# Altium PCB smartmcu.v2.PcbDoc
Units mil, origin at the board's own origin, x right, y up, seen from the top; angles counter-clockwise.
Board outline 2102 x 1843 mil, 4 copper layers (Top Layer, GND Layer, 3.3V Layer, Bottom Layer), stack 23.756 mil thick; 88 components, 43 nets, 255 pads, 83 vias.
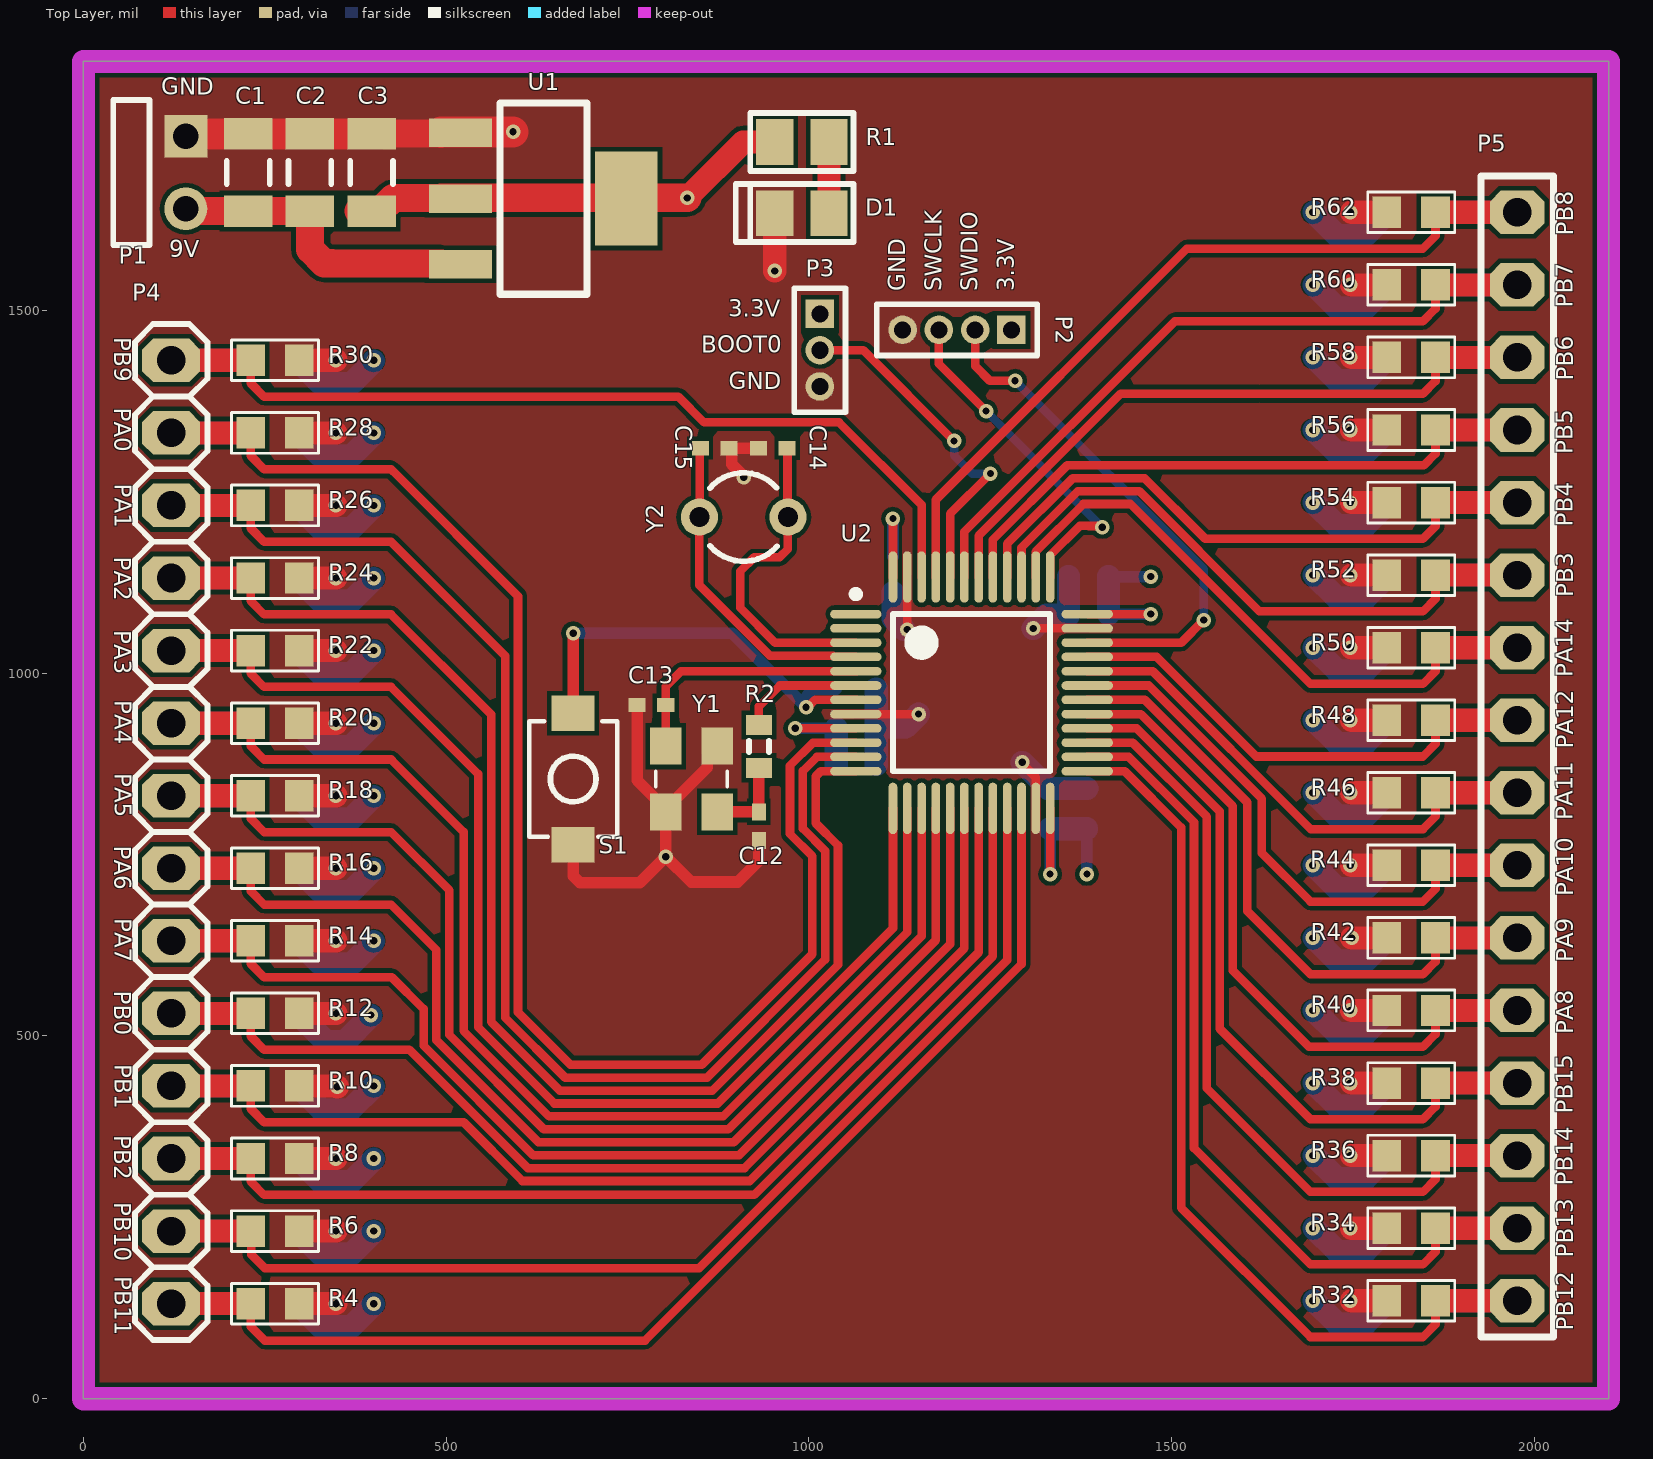
[diagram p0: Top Layer view]
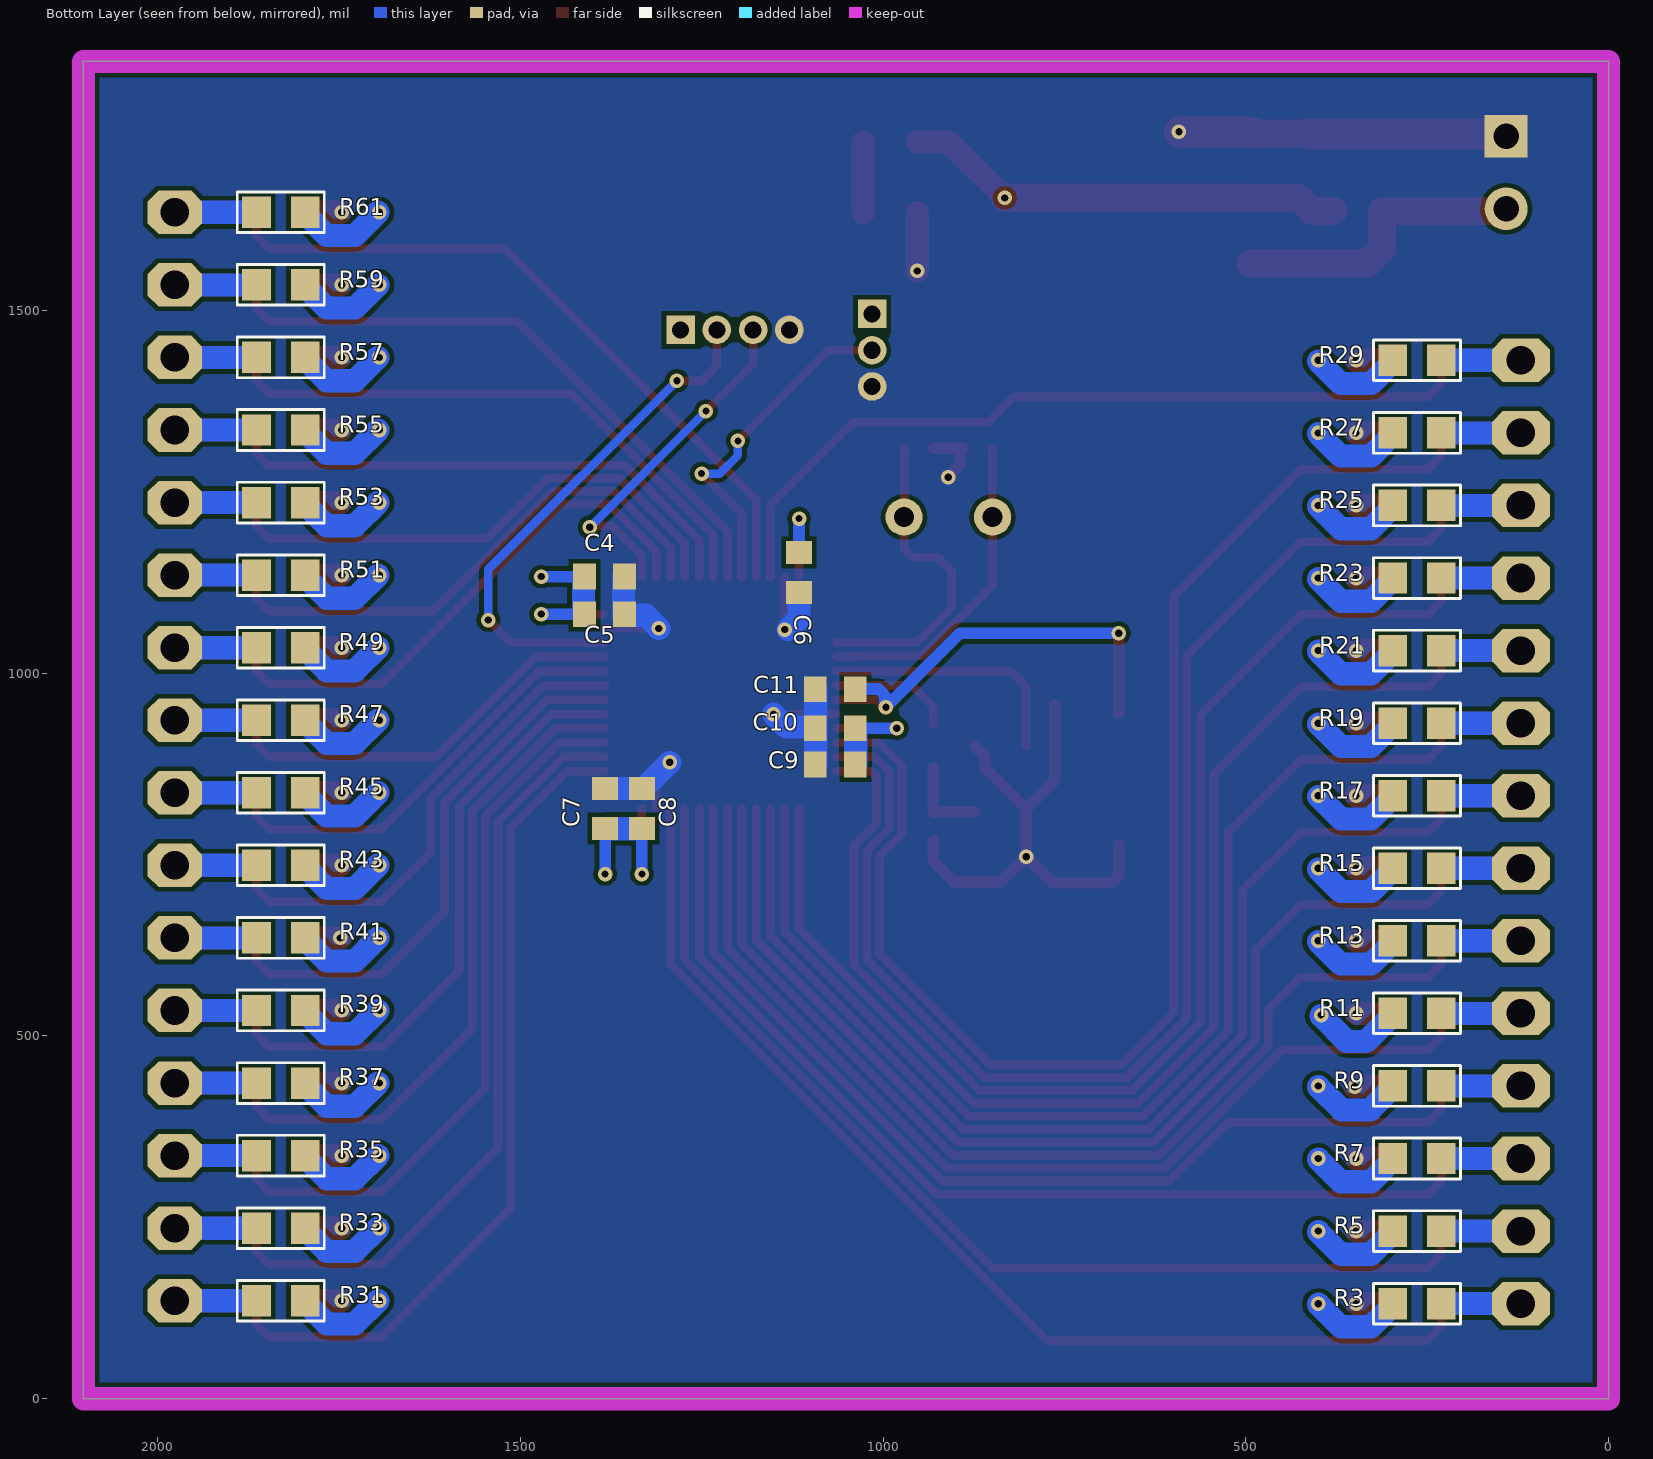
[diagram p1: Bottom Layer view, seen from below]
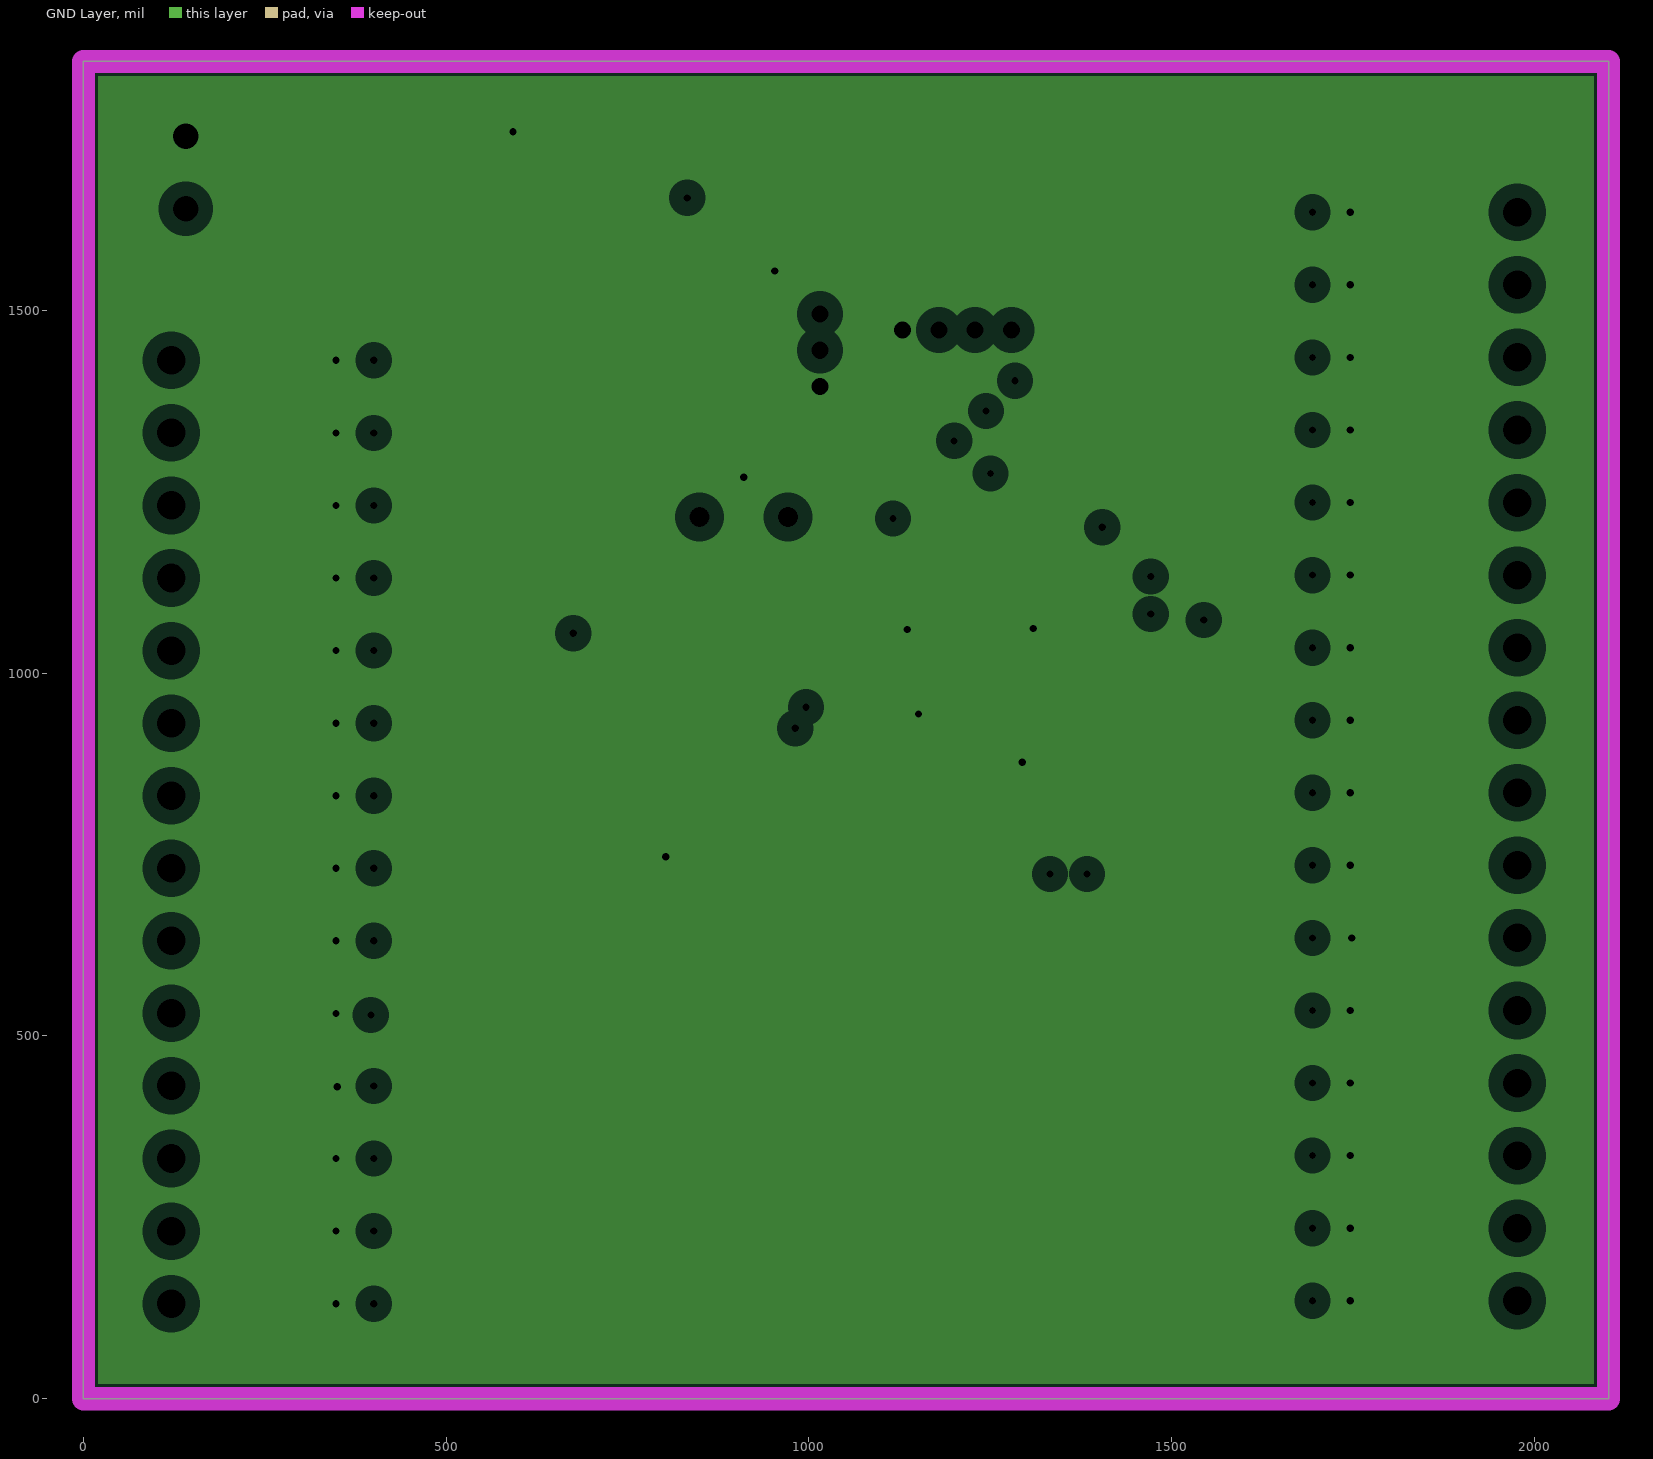
[diagram p2: GND Layer, clearances drawn from the general rule]
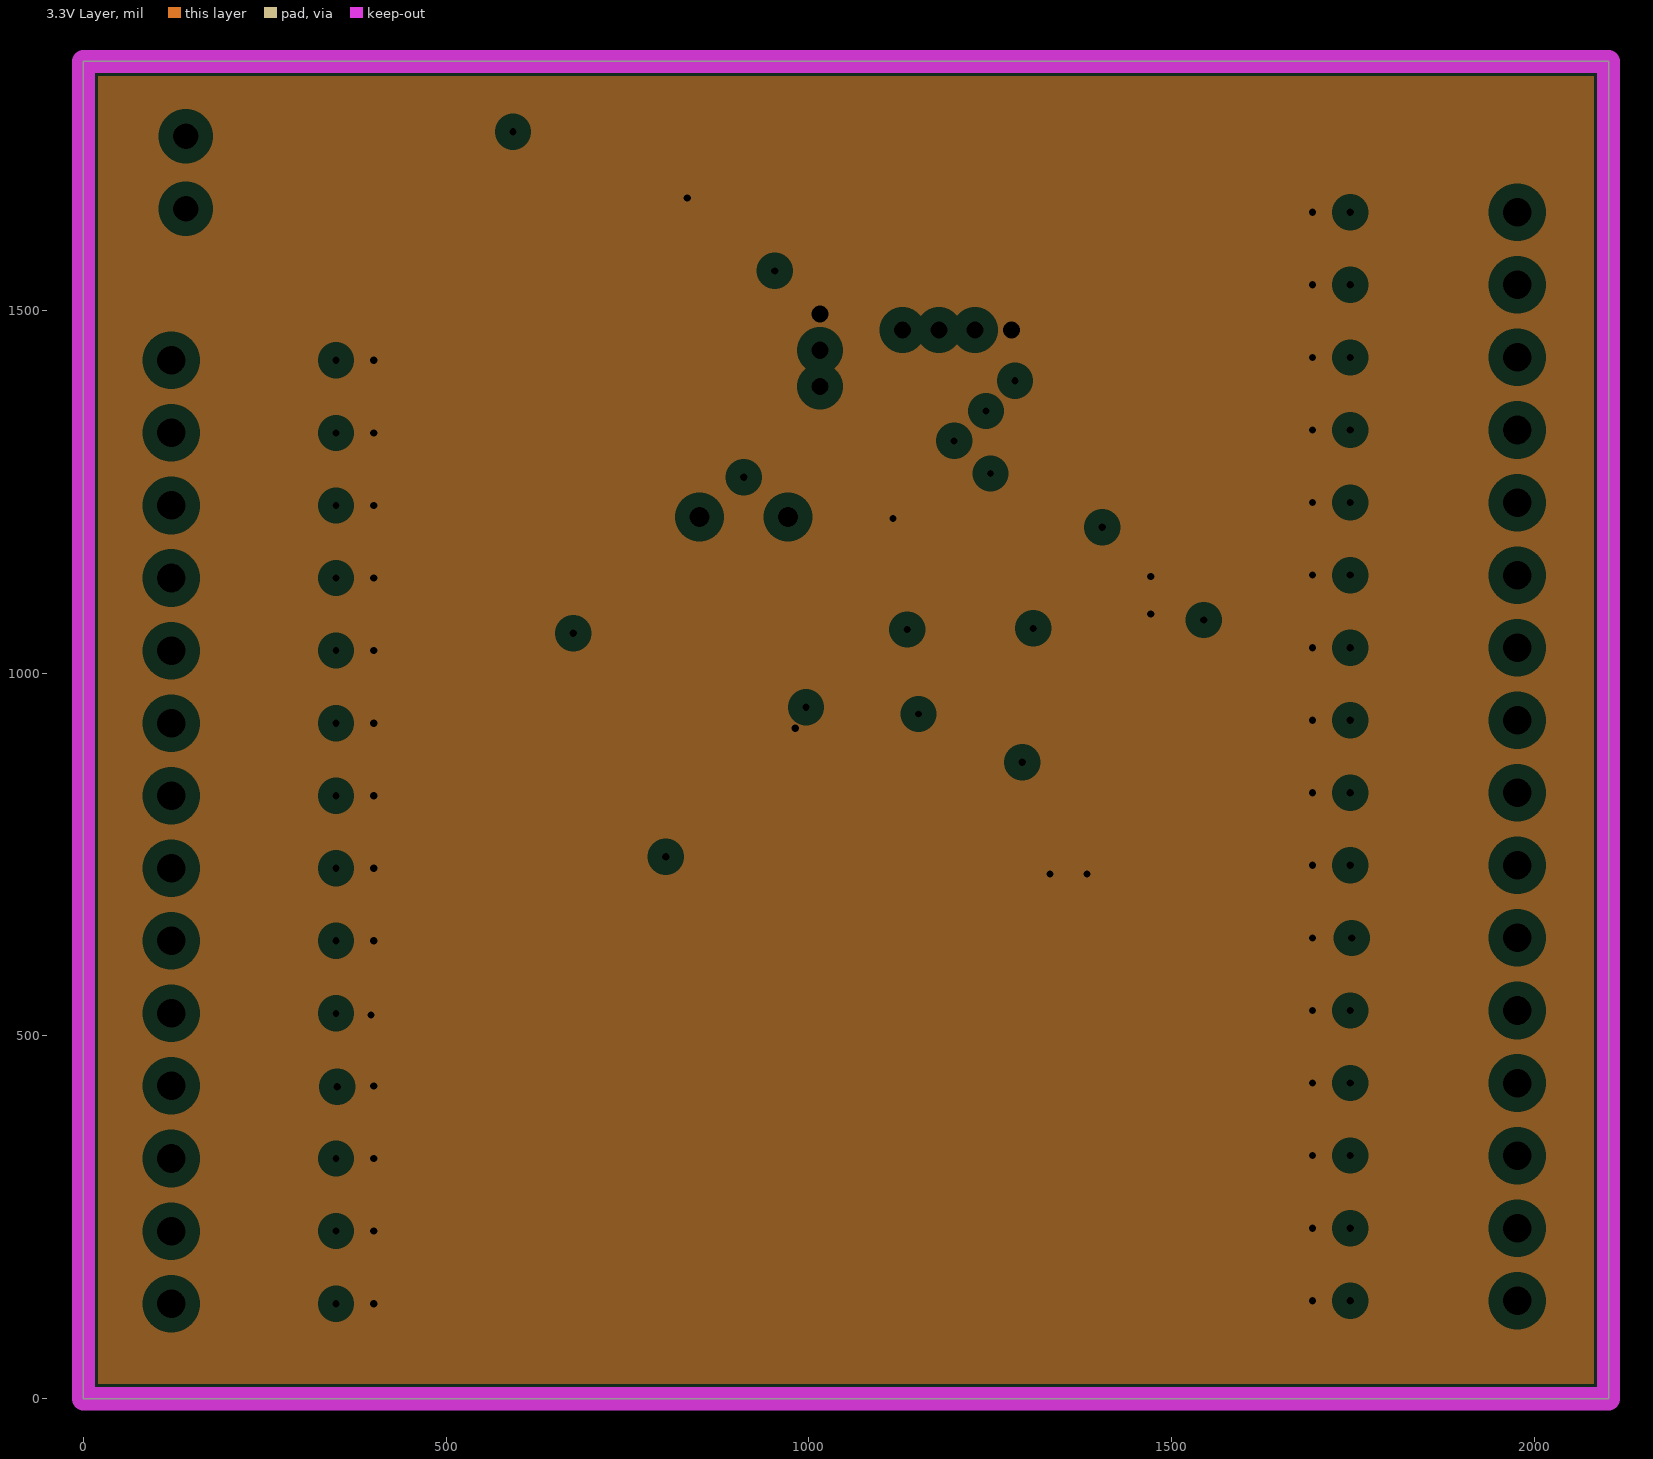
[diagram p3: 3.3V Layer, clearances drawn from the general rule]
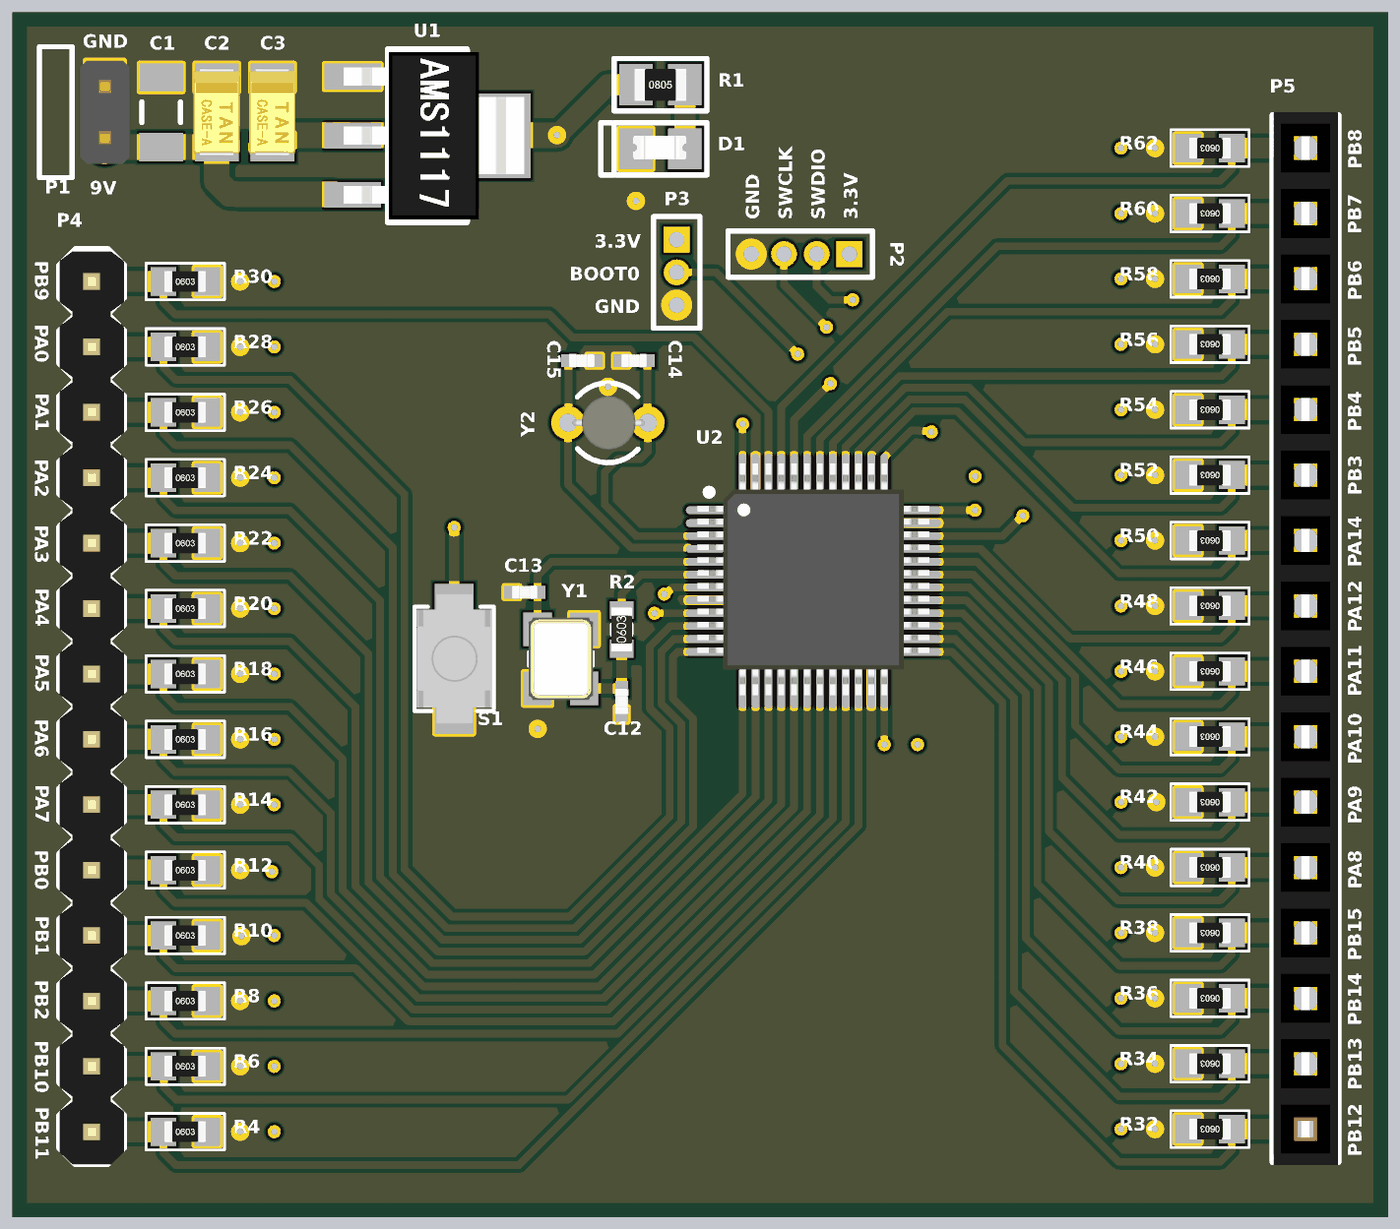
[diagram p4: 3D render of the assembled board from above, using the file's embedded part models]
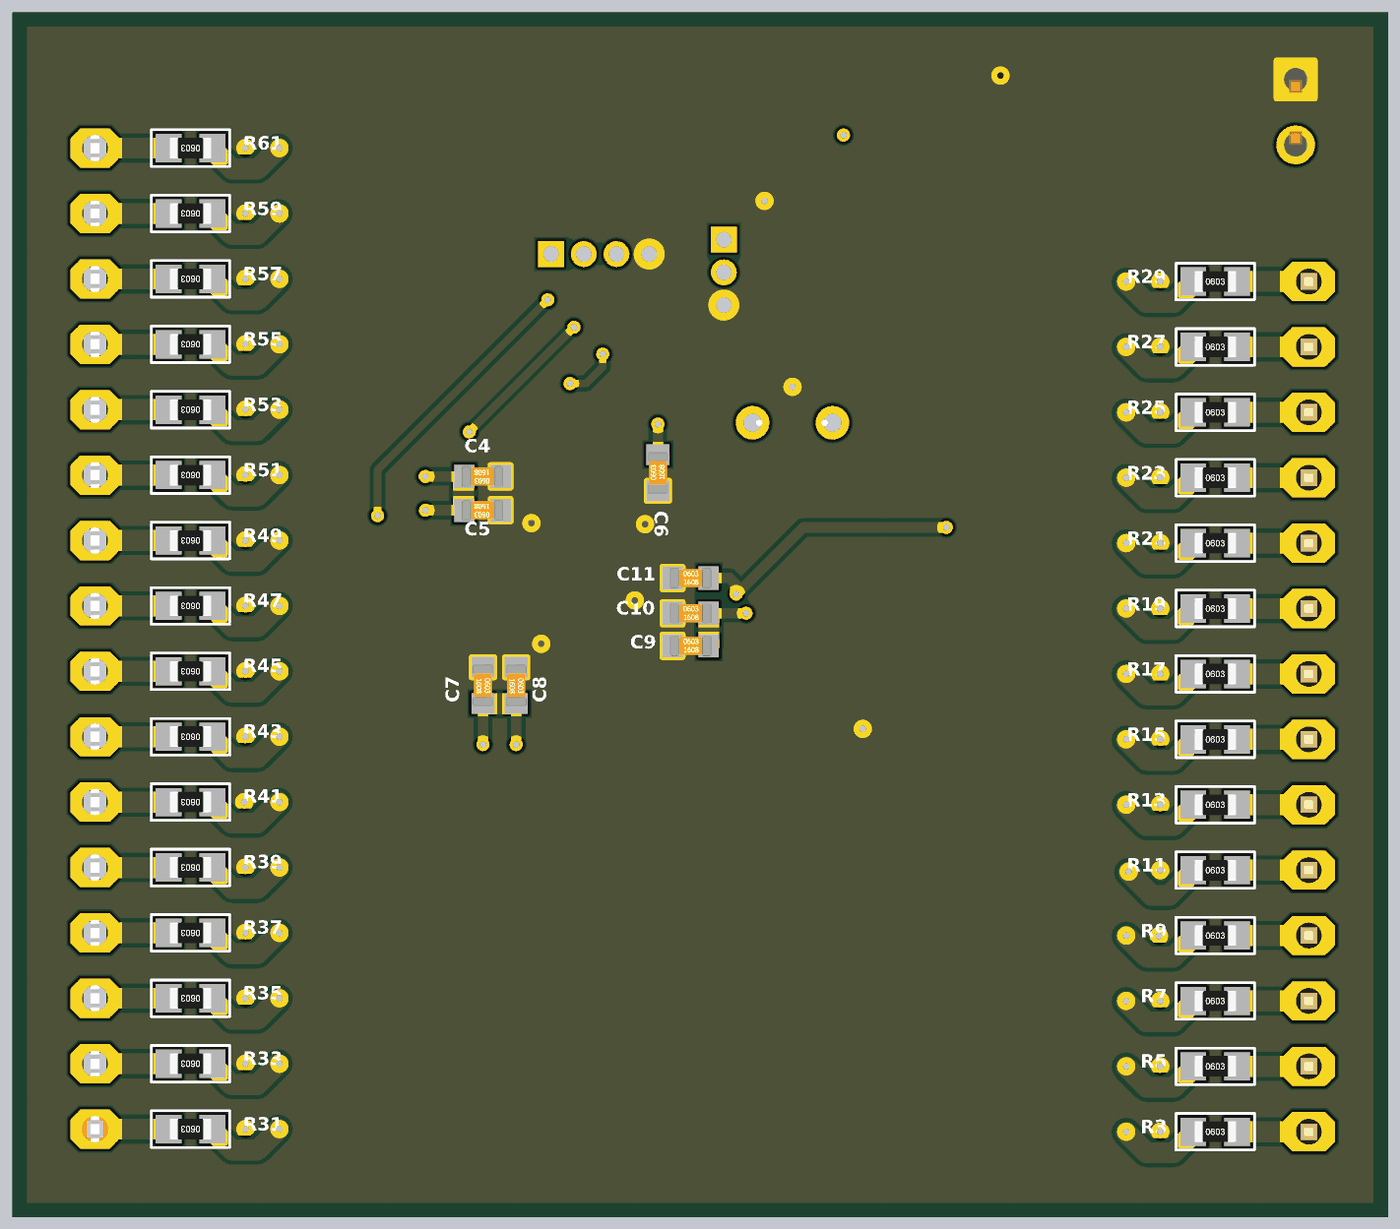
[diagram p5: 3D render of the assembled board from below, using the file's embedded part models]

## Layer stack, top to bottom
Top Solder: solder mask 0.4, Solder Resist, Dk 3.5
Top Layer: signal copper 1.4
Dielectric 2: prepreg 2.8, PP-006, Dk 4.1
GND Layer: plane copper 1.378, net GND
Dielectric 1: dielectric 12.6, FR-4, Dk 4.8
3.3V Layer: plane copper 1.378, net +3.3V
Dielectric 3: prepreg 2.8, PP-006, Dk 4.1
Bottom Layer: signal copper 1.4
Bottom Solder: solder mask 0.4, Solder Resist, Dk 3.5

## Board outline
0,0 0,1843 2102,1843 2102,0

## Design rules (kind name [scope] priority, off if disabled: settings)
Clearance [All] p1: gap=6 ignorepadtopadclearanceinfootprint=FALSE
MinimumSolderMaskSliver [All] p1: minsoldermaskwidth=2
PlaneClearance [All] p1: clearance=20
PlaneConnect [All] p1: planeconnectstyle=Direct reliefexpansion=20 reliefentries=4 reliefconductorwidth=10 reliefairgap=10
PolygonConnect [All] p1: connectstyle=Direct reliefconductorwidth=10 reliefentries=4 polygonreliefangle="90 Angle" airgapwidth=10
RoutingVias [All] p1: holewidth=10 width=20 viastyle="Through Hole" minholewidth=10 minwidth=20 maxholewidth=28 maxwidth=50
SilkToSilkClearance [All] p1: silktosilkclearance=0.5
SilkToSolderMaskClearance [IsPad] p1: minsilkscreentomaskgap=2 clearancetoexposedcopper=TRUE
SolderMaskExpansion [All] p1: expansion=4 istentingtop=FALSE
SupplyNets "Schematic Supply Nets_2" [InNet('GND')] p1: voltage=0.000
SupplyNets "Schematic Supply Nets_1" [InNet('+9V')] p2: voltage=0.000
SupplyNets "Schematic Supply Nets" [InNet('+3.3V')] p3: voltage=0.000
UnConnectedPin [All] p1:
Width [All] p1: maxlimit=43 minlimit=10 preferedwidth=10
25 further rules are at their usual default settings.

## Classes and differential pairs
component class MCU: C4 C5 C6 C7 C8 C9 C10 C11 C12 C13 C14 C15 P2 P3 P4 P5 R2 R3 R4 R5 R6 R7 R8 R9 R10 R11 R12 R13 R14 R15 R16 R17 R18 R19 R20 R21 R22 R23 R24 R25 R26 R27 R28 R29 R30 R31 R32 R33 R34 R35 R36 R37 R38 R39 R40 R41 R42 R43 R44 R45 R46 R47 R48 R49 R50 R51 R52 R53 R54 R55 R56 R57 R58 R59 R60 R61 R62 S1 U2 Y1 Y2
component class PowerSupply: C1 C2 C3 D1 P1 R1 U1

## Components (designator, comment, footprint, x,y, rotation, side; value= is the part's Value field where it differs from the comment)
C1 "" C1206 227.17,1689.89 r270 top value=100nF
C2 "tantalum cap" C1206tancap 312.17,1689.89 r270 top value=10uF
C3 "tantalum cap" C1206tancap 397.17,1689.89 r270 top value=100uF
C4 "" 1608[0603] 1383.73,1133 r0 bottom value=100nF
C5 "" 1608[0603] 1383.73,1081.27 r0 bottom value=100nF
C6 "" 1608[0603] 1115.73,1138.55 r90 bottom value=100nF
C7 "" 1608[0603] 1383.02,813.55 r270 bottom value=100nF
C8 "Cap Semi" 1608[0603] 1332.27,813.55 r270 bottom value=4.7uF
C9 "Cap Semi" 1608[0603] 1065.73,874 r180 bottom value=10nF
C10 "Cap Semi" 1608[0603] 1065.73,923.79 r180 bottom value=1uF
C11 "" 1608[0603] 1065.73,977.55 r180 bottom value=100nF
C12 "Cap Semi_4" 0402 931,789.04 r270 top value=10pF
C13 "Cap Semi_4" 0402 782.88,956 r180 top value=10pF
C14 "Cap Semi_4" 0402 950,1310 r180 top value=10pF
C15 "Cap Semi_4" 0402 870,1310 r0 top value=10pF
D1 "LED" MY_LED_0805 990.17,1636.89 r0 top
P1 "" HDR1X2H 141.17,1739.89 r270 top
P2 "MHDR1X4" MHDR1X4 1279,1473 r180 top
P3 "MHDR1X3" MHDR1X3 1015,1495 r270 top
P4 "Header 14" My_1X14 121,781 r90 top
P5 "Header 16" MY_FE16 1976,885 r90 top
R1 "330R" MY_0805 990.17,1731.89 r0 top
R2 "" J1-0603 931,899 r90 top value=10R
R3 "1K" MY_0603 264,131 r180 bottom
R4 "1K" MY_0603 264,131 r0 top
R5 "1K" MY_0603 264,231 r180 bottom
R6 "1K" MY_0603 264,231 r0 top
R7 "1K" MY_0603 264,331 r180 bottom
R8 "1K" MY_0603 264,331 r0 top
R9 "1K" MY_0603 264,431 r180 bottom
R10 "1K" MY_0603 264,431 r0 top
R11 "1K" MY_0603 264,531 r180 bottom
R12 "1K" MY_0603 264,531 r0 top
R13 "1K" MY_0603 264,631 r180 bottom
R14 "1K" MY_0603 264,631 r0 top
R15 "1K" MY_0603 264,731 r180 bottom
R16 "1K" MY_0603 264,731 r0 top
R17 "1K" MY_0603 264,831 r180 bottom
R18 "1K" MY_0603 264,831 r0 top
R19 "1K" MY_0603 264,931 r180 bottom
R20 "1K" MY_0603 264,931 r0 top
R21 "1K" MY_0603 264,1031 r180 bottom
R22 "1K" MY_0603 264,1031 r0 top
R23 "1K" MY_0603 264,1131 r180 bottom
R24 "1K" MY_0603 264,1131 r0 top
R25 "1K" MY_0603 264,1231 r180 bottom
R26 "1K" MY_0603 264,1231 r0 top
R27 "1K" MY_0603 264,1331 r180 bottom
R28 "1K" MY_0603 264,1331 r0 top
R29 "1K" MY_0603 264,1431 r180 bottom
R30 "1K" MY_0603 264,1431 r0 top
R31 "1K" MY_0603 1830,135 r0 bottom
R32 "1K" MY_0603 1830,135 r180 top
R33 "1K" MY_0603 1830,235 r0 bottom
R34 "1K" MY_0603 1830,235 r180 top
R35 "1K" MY_0603 1830,335 r0 bottom
R36 "1K" MY_0603 1830,335 r180 top
R37 "1K" MY_0603 1830,435 r0 bottom
R38 "1K" MY_0603 1830,435 r180 top
R39 "1K" MY_0603 1830,535 r0 bottom
R40 "1K" MY_0603 1830,535 r180 top
R41 "1K" MY_0603 1830,635 r0 bottom
R42 "1K" MY_0603 1830,635 r180 top
R43 "1K" MY_0603 1830,735 r0 bottom
R44 "1K" MY_0603 1830,735 r180 top
R45 "1K" MY_0603 1830,835 r0 bottom
R46 "1K" MY_0603 1830,835 r180 top
R47 "1K" MY_0603 1830,935 r0 bottom
R48 "1K" MY_0603 1830,935 r180 top
R49 "1K" MY_0603 1830,1035 r0 bottom
R50 "1K" MY_0603 1830,1035 r180 top
R51 "1K" MY_0603 1830,1135 r0 bottom
R52 "1K" MY_0603 1830,1135 r180 top
R53 "1K" MY_0603 1830,1235 r0 bottom
R54 "1K" MY_0603 1830,1235 r180 top
R55 "1K" MY_0603 1830,1335 r0 bottom
R56 "1K" MY_0603 1830,1335 r180 top
R57 "1K" MY_0603 1830,1435 r0 bottom
R58 "1K" MY_0603 1830,1435 r180 top
R59 "1K" MY_0603 1830,1535 r0 bottom
R60 "1K" MY_0603 1830,1535 r180 top
R61 "1K" MY_0603 1830,1635 r0 bottom
R62 "1K" MY_0603 1830,1635 r180 top
S1 "PUSH_BUTTON_SMD_3X4X2" PUSH_BUTTON_SMD_3X4X2 675,854 r90 top
U1 "" "4-Pin SOT" 634,1522 r270 top
U2 "" STM-LQFP48_N 1224,973 r0 top
Y1 "ECS-80-12-33-JGN-TR" XTAL_ECS-240-8-33-AGN-TR 838,854 r90 top
Y2 "" R38 910,1215 r270 top

## Footprints (in the part's own frame and the unit in brackets; to place one, negate y for a bottom-side part, rotate by r counter-clockwise, add the part's x,y. Pads: shape width x height; smd on the part's side, far side on the other; paste and mask are expansions set on the pad)
"4-Pin SOT" [mm]
  rect 1x2.2 smd: 0(-1.05,-2.9) 1(-5.65,-2.9) 2(-3.35,-2.9)
  rect 3.3x2.2 smd: 2(-3.35,2.9)
  silkscreen extent -6.7,-1.52 0,1.52, body extent -6.6,-3.25 -0.1,3.75, height 1.61
0402 [mm]
  rect 0.6x0.5 smd: 1(-0.5,0) 2(0.5,0)
  body extent -0.5,-0.27 0.5,0.27, height 0.36
1608[0603] [mm]
  rect 0.8x0.9 smd: 1(-0.7,0) 2(0.7,0)
  body extent -0.8,-0.4 0.8,0.4, height 0.8
C1206 [mm] "Chip Capacitor, Body 3.2x1.6mm, IPC High Density"
  rect 1.1x1.7 smd: 1(-1.35,0) 2(1.35,0)
  silkscreen extent -0.4,-0.75 0.4,0.75, body extent -1.7,-0.9 1.7,0.9, height 1.3
C1206tancap [mm]
  rect 1.1x1.7 smd: 1(-1.35,0) 2(1.35,0)
  silkscreen extent -0.4,-0.75 0.4,0.75, body extent -1.7,-0.9 1.7,0.9, height 1.8
HDR1X2H [mm]
  rect 1.5x1.5 hole 0.9: 1(0,0)
  round 1.5 hole 0.9: 2(2.54,0)
  silkscreen extent -1.27,-2.54 3.81,-1.27, body extent -0.73,-1 3.27,1, height 4.81
J1-0603 [mm]
  rect 0.7x0.9 smd: 1(-0.75,0) 2(0.75,0)
  silkscreen extent -0.2,-0.35 0.2,0.35, body extent -0.85,-0.4 0.85,0.4, height 0.56
MHDR1X3 [mm] "Connector; Header; 3 Position"
  rect 1x1 hole 0.6: 1(0,0)
  round 1 hole 0.6: 2(1.27,0) 3(2.54,0)
  silkscreen extent -0.9,-0.9 3.44,0.9
MHDR1X4 [mm] "Connector; Header; 4 Position"
  rect 1x1 hole 0.6: 1(0,0)
  round 1 hole 0.6: 2(1.27,0) 3(2.54,0) 4(3.81,0)
  silkscreen extent -0.9,-0.9 4.71,0.9
My_1X14 [mil]
  oct 60x80 hole 39.37: 1(-650,0) 2(-550,0) 3(-450,0) 4(-350,0) 5(-250,0) 6(-150,0) 7(-50,0) 8(50,0) 9(150,0) 10(250,0) 11(350,0) 12(450,0) 13(550,0) 14(650,0)
  silkscreen extent -700,-50 700,50, body extent -700,-49 696,49, height 323
MY_0603 [mm]
  rect 1x1.1 smd: 1(-0.85,0) 2(0.85,0)
  silkscreen extent -1.52,-0.71 1.52,0.71, body extent -0.8,-0.4 0.8,0.4, height 0.44
MY_0805 [mm]
  rect 1.3x1.6 smd: 1(-0.95,0) 2(0.95,0)
  silkscreen extent -1.8,-1.02 1.8,1.02, body extent -1,-0.62 1,0.63, height 0.59
MY_FE16 [mil]
  oct 60x75 hole 39.37: 1(-750,0) 2(-650,0) 3(-550,0) 4(-450,0) 5(-350,0) 6(-250,0) 7(-150,0) 8(-50,0) 9(50,0) 10(150,0) 11(250,0) 12(350,0) 13(450,0) 14(550,0) 15(650,0) 16(750,0)
  silkscreen extent -800,-50 800,50, body extent -805,-49 805,49, height 335
MY_LED_0805 [mm]
  rect 1.3x1.6 smd: A(0.95,-0.076) K(-0.95,-0.076)
  silkscreen extent -2.31,-1.09 1.8,0.94, body extent -1.06,-0.48 1.01,0.42, height 0.86
PUSH_BUTTON_SMD_3X4X2 [mm]
  rect 1.23x1.5 smd: 1(-2.3,0) 2(2.3,0)
  silkscreen extent -2.03,-1.54 2.03,1.54, body extent -2.49,-1.45 2.51,1.45, height 2
R38 [mm]
  round 1.3 hole 0.7: 1(0,1.55) 2(0,-1.55)
  silkscreen extent -1.55,-1.19 1.55,1.17, body extent -1.04,-1.37 1.04,1.43, height 8.2
STM-LQFP48_N [mm]
  oval 1.8x0.3 smd: 1(-4.05,2.75) 2(-4.05,2.25) 3(-4.05,1.75) 4(-4.05,1.25) 5(-4.05,0.75) 6(-4.05,0.25) 7(-4.05,-0.25) 8(-4.05,-0.75) 9(-4.05,-1.25) 10(-4.05,-1.75) 11(-4.05,-2.25) 12(-4.05,-2.75) 25(4.05,-2.75) 26(4.05,-2.25) 27(4.05,-1.75) 28(4.05,-1.25) 29(4.05,-0.75) 30(4.05,-0.25) 31(4.05,0.25) 32(4.05,0.75) 33(4.05,1.25) 34(4.05,1.75) 35(4.05,2.25) 36(4.05,2.75)
  oval 0.3x1.8 smd: 13(-2.75,-4.05) 14(-2.25,-4.05) 15(-1.75,-4.05) 16(-1.25,-4.05) 17(-0.75,-4.05) 18(-0.25,-4.05) 19(0.25,-4.05) 20(0.75,-4.05) 21(1.25,-4.05) 22(1.75,-4.05) 23(2.25,-4.05) 24(2.75,-4.05) 37(2.75,4.05) 38(2.25,4.05) 39(1.75,4.05) 40(1.25,4.05) 41(0.75,4.05) 42(0.25,4.05) 43(-0.25,4.05) 44(-0.75,4.05) 45(-1.25,4.05) 46(-1.75,4.05) 47(-2.25,4.05) 48(-2.75,4.05)
  silkscreen extent -4.17,-2.75 2.75,3.57, body extent -4.5,-4.44 4.5,4.56, height 1.56
XTAL_ECS-240-8-33-AGN-TR [mm]
  rect 1.3x1.1 smd: 1(-1.15,-0.9) 2(1.15,-0.9) 3(1.15,0.9) 4(-1.15,0.9)
  silkscreen extent -0.27,-1.25 0.27,1.25, body extent -1.6,-1.25 1.6,1.25, height 0.8

## Part data
C1 C4 C5 C6 C7 C11: library part "Cap Semi", "Capacitor (Semiconductor SIM Model)", LatestRevisionDate=29-May-2009, LatestRevisionNote="IPC-7351 Footprint Added.", PackageDescription="Chip Capacitor", PackageReference=C1206, Published=8-Jun-2000, Publisher="Altium Limited"
C2 C3: library part "Cap Semi_5", "Capacitor (Semiconductor SIM Model)", LatestRevisionDate=29-May-2009, LatestRevisionNote="IPC-7351 Footprint Added.", PackageDescription="Chip Capacitor", PackageReference=C1206, Published=8-Jun-2000, Publisher="Altium Limited"
C8: library part "Cap Semi_1", "Capacitor (Semiconductor SIM Model)", LatestRevisionDate=29-May-2009, LatestRevisionNote="IPC-7351 Footprint Added.", PackageDescription="Chip Capacitor", PackageReference=C1206, Published=8-Jun-2000, Publisher="Altium Limited"
C9: library part "Cap Semi_3", "Capacitor (Semiconductor SIM Model)", LatestRevisionDate=29-May-2009, LatestRevisionNote="IPC-7351 Footprint Added.", PackageDescription="Chip Capacitor", PackageReference=C1206, Published=8-Jun-2000, Publisher="Altium Limited"
C10: library part "Cap Semi_2", "Capacitor (Semiconductor SIM Model)", LatestRevisionDate=29-May-2009, LatestRevisionNote="IPC-7351 Footprint Added.", PackageDescription="Chip Capacitor", PackageReference=C1206, Published=8-Jun-2000, Publisher="Altium Limited"
C12 C13 C14 C15: "Capacitor (Semiconductor SIM Model)", LatestRevisionDate=29-May-2009, LatestRevisionNote="IPC-7351 Footprint Added.", PackageDescription="Chip Capacitor", PackageReference=C1206, Published=8-Jun-2000, Publisher="Altium Limited"
D1: "Typical INFRARED GaAs LED", ASiD Part Number=LED-AS
P1: library part "Header 2H", "Header, 2-Pin, Right Angle", LatestRevisionDate=17-Jul-2002, LatestRevisionNote="Re-released for DXP Platform.", Publisher="Altium Limited"
P2: "Header, 4-Pin", LatestRevisionDate=17-Jul-2002, LatestRevisionNote="Re-released for DXP Platform.", Publisher="Altium Limited"
P3: "Header, 3-Pin", LatestRevisionDate=17-Jul-2002, LatestRevisionNote="Re-released for DXP Platform.", Publisher="Altium Limited"
P4: "Header, 14-Pin", ASiD Part Number="Header 14-AS"
P5: "Header, 16-Pin", ASiD Part Number="Header 16-AS"
R1 R3 R4 R5 R6 R7 R8 R9 R10 R11 R12 R13 R14 R15 R16 R17 R18 R19 R20 R21 R22 R23 R24 R25 R26 R27 R28 R29 R30 R31 R32 R33 R34 R35 R36 R37 R38 R39 R40 R41 R42 R43 R44 R45 R46 R47 R48 R49 R50 R51 R52 R53 R54 R55 R56 R57 R58 R59 R60 R61 R62: library part Res, "Standard resistor", ASiD Part Number=Res-AS
R2: library part Res3, "Resistor", LatestRevisionDate=29-May-2009, LatestRevisionNote="IPC-7351 Footprint Added.", PackageDescription="Chip Resistor", PackageReference=J1-0603, Published=8-Jun-2000, Publisher="Altium Limited"
S1: "Push Button Tactile Switch SMD 2 Pins 3x4x2mm.", JLCPCB PN=C231644
U1: library part lm1117, "The LM1117 is a low dropout voltage regulator with a dropout of 1.2 V at 800 mA of load current. / The  LM1117  is  available  in  an  adjustable  version, which can set the output voltage from 1.25 V to 13.8 V with only two external resistors. In addition, the device is available in five fixed voltages, 1.8 V, 2.5 V, 3.3 V, and 5 V. / The  LM1117  offers  current  limiting  and  thermal shutdown. The circuit includes a Zener trimmed band-gap  reference  to  assure  output  voltage  accuracy  to within ±1%. / A  minimum  of  10-µF  tantalum  capacitor  is  required at  the  output  to  improve  the  transient  response  and stability.", output voltage=3.3V, ComponentLink1Description="Product deatils", ComponentLink1URL=https://www.ti.com/product/LM1117, ComponentLink2Description=Datasheet, ComponentLink2URL=https://www.ti.com/lit/ds/symlink/lm1117.pdf
U2: library part STM32F103C8T6, "ARM Cortex-M3 32-bit MCU, 64 KB Flash, 20 KB Internal RAM, 37 I/Os, 48-pin LQFP, -40 to 85 degC, Tray", I/Os (High Current)=37, Operating Frequency(F) (Processor speed) (MHz)=72, Supplier Part Number 1=497-6063-ND, Supply Voltage(Vcc) min (V)=2, A/D Converter="2x12-bit (10 Channel)", ComponentLink1Description="Manufacturer URL", ComponentLink1URL=http://www.st.com/web/en/home.html, ComponentLink2Description=Datasheet, ComponentLink2URL=http://www.st.com/st-web-ui/static/active/en/resource/technical/document/datasheet/CD00161566.pdf, ComponentLink3Description="Package Specification", ComponentLink3URL=http://www.st.com/st-web-ui/static/active/en/resource/technical/document/datasheet/DM00058181.pdf, Core="ARM Cortex-M3", DatasheetVersion="Rev. 16", FLASH Size (Prog) (kB)=64, Internal RAM Size (kB)=20, Mounting Technology="Surface Mount", PackageDescription="48-Pin Low Profile Quad Flat Package, 7 x 7 mm Body, 0.5 mm Pitch", PackageReference=LQFP48, PackageVersion="Rev. 6, 06/2013", Packing=Tray, PartNumber=STM32F103C8T6, Supplier 1=Digi-Key, Supplier 2=Farnell, Supplier 3=Newark, Supplier 4=Newark, Supplier 5=Mouser, Supplier Part Number 2=1447637, Supplier Part Number 3=59M2182, Supplier Part Number 4=57P1222, Supplier Part Number 5=511-STM32F103C8T6
Y1: "8 MHz Â±20ppm Crystal 12pF 400 Ohms 4-SMD, No Lead", Package="ECX-32-33-4 ECS", Check_prices=https://www.snapeda.com/parts/ECS-80-12-33-JGN-TR/ECS/view-part/?ref=eda, MF="ECS Inc.", MP=ECS-80-12-33-JGN-TR, SnapEDA_Link=https://www.snapeda.com/parts/ECS-80-12-33-JGN-TR/ECS/view-part/?ref=snap
Y2: library part XTAL, "Crystal Oscillator", LatestRevisionDate=17-Jul-2002, LatestRevisionNote="Re-released for DXP Platform.", PackageDescription="Crystal, Thru-Hole; 2 Leads; Body 3.1 x 8.2 mm (Dia.xH)", PackageReference=R38, Published=8-Jun-2000, Publisher="Altium Limited"

## Via types
v1: diameter 20, hole 10, Top Layer to Bottom Layer, 83 vias

## Nets (pads, with @x,y where several pads share a name; then routed paths per layer and width w, separated by ;. In a path a pad name is that pad's centre, name@x,y a point inside that pad or via, vN(x,y) a via of type N, cw(c..) or ccw(c..) an arc to the next point about the centre after c; other vN are vias at no path point)
32KHz_01: C14.1 U2.3 Y2.1 | length 447.8
  Top Layer w11.8: C14.1 970.35,1309.33 970.35,1215.67 Y2.1 971.02,1171.02 959.49,1159.49 924.49,1159.49 905,1140 905,1090.17 953.28,1041.9 U2.3
32KHz_02: C15.1 U2.4 Y2.2 | length 446
  Top Layer w11.8: C15.1 849.65,1309.33 849.65,1215.67 Y2.2 848.98,1121.02 945.91,1024.09 1033.14,1024.09 1035.02,1022.21 U2.4
+3.3V: C3.2 C4.2 C5.2 C6.2 C7.2 C8.2 C9.2 C10.2 P2.1 P3.1 R1.1 R3.1 R5.1 R7.1 R9.1 R11.1 R13.1 R15.1 R17.1 R19.1 R21.1 R23.1 R25.1 R27.1 R29.1 R31.1 R33.1 R35.1 R37.1 R39.1 R41.1 R43.1 R45.1 R47.1 R49.1 R51.1 R53.1 R55.1 R57.1 R59.1 R61.1 U1.2 U2.9 U2.24 U2.36 U2.48 | length 5359.8
  Top Layer w11.8: v1(981.02,923.79) U2.9 ; U2.48 v1(1115.73,1213) ; v1(1332.27,723) U2.24 ; U2.36@1384.72,1081.27 v1(1471.02,1081.27)
  Top Layer w32: v1(832.17,1654.89) 909.17,1731.89 R1.1
  Top Layer w39: C3.2@379.17,1636.74 408.98,1636.74 426.95,1654.7 492.82,1654.7 493,1654.89 721.35,1654.89 v1(832.17,1654.89)
  Bottom Layer w11.8: C7.2@1382.27,785.44 C7.2@1383.02,784.69 ; v1(1471.02,1133) v1@1476.02,1133
  Bottom Layer w16: v1(981.02,923.79) C10.2@1037.71,923.79 ; C6.2@1115.73,1160.56 C6.2 v1(1115.73,1213) ; v1(1332.27,723) C8.2@1332.27,784.69 ; v1(1383.02,723) C7.2@1383.02,784.69 ; C5.2@1412.83,1081.27 v1(1471.02,1081.27) ; C4.2@1412.83,1133 v1(1471.02,1133)
  Bottom Layer w32: R3.1 297.46,129.03 327.5,99 369,99 v1@400,130 ; R5.1 297.46,229.03 327.5,199 369,199 v1@400,230 ; R7.1 297.46,329.03 327.5,299 369,299 v1@400,330 ; R9.1 297.46,429.03 328.5,398 368,398 v1@400,430 ; R11.1 301.15,527.31 301.15,525.35 334.26,492.24 360.77,492.24 v1@396.21,527.69 ; R13.1 297.46,629.03 327.5,599 369,599 v1@400,630 ; R15.1 297.46,729.03 327.5,699 369,699 v1@400,730 ; R17.1 297.46,829.03 327.5,799 369,799 v1@400,830 ; R19.1 297.46,929.03 327.5,899 369,899 v1@400,930 ; R21.1 297.46,1029.03 327.5,999 369,999 v1@400,1030 ; R23.1 297.46,1129.03 327.5,1099 369,1099 v1@400,1130 ; R25.1 297.46,1229.03 327.5,1199 369,1199 v1@400,1230 ; R27.1 297.46,1329.03 327.5,1299 369,1299 v1@400,1330 ; R29.1 297.46,1429.03 327.5,1399 369,1399 v1@400,1430 ; C9.2@1037.71,874 C10.2@1037.71,923.79 ; C8.2@1332.27,785.44 C7.2@1382.27,785.44 ; C5.2@1412.83,1081.27 C4.2@1412.83,1133 ; v1@1696,135 1728,103 1766.5,103 1792.85,129.35 1793.88,129.35 R31.1@1799.54,135 ; v1@1696,235 1728,203 1766.5,203 1792.85,229.35 1793.88,229.35 R33.1@1799.54,235 ; v1@1696,335 1728,303 1766.5,303 1792.85,329.35 1793.88,329.35 R35.1@1799.54,335 ; v1@1696,435 1728,403 1766.5,403 1792.85,429.35 1793.88,429.35 R37.1@1799.54,435 ; v1@1696,535 1728,503 1766.5,503 1792.85,529.35 1793.88,529.35 R39.1@1799.54,535 ; v1@1696,635 1728,603 1766.5,603 1792.85,629.35 1793.88,629.35 R41.1@1799.54,635 ; v1@1696,735 1728,703 1766.5,703 1792.85,729.35 1793.88,729.35 R43.1@1799.54,735 ; v1@1696,835 1728,803 1766.5,803 1792.85,829.35 1793.88,829.35 R45.1@1799.54,835 ; v1@1696,935 1728,903 1766.5,903 1792.85,929.35 1793.88,929.35 R47.1@1799.54,935 ; v1@1696,1035 1728,1003 1766.5,1003 1792.85,1029.35 1793.88,1029.35 R49.1@1799.54,1035 ; v1@1696,1135 1728,1103 1766.5,1103 1792.85,1129.35 1793.88,1129.35 R51.1@1799.54,1135 ; v1@1696,1235 1728,1203 1766.5,1203 1792.85,1229.35 1793.88,1229.35 R53.1@1799.54,1235 ; v1@1696,1335 1728,1303 1766.5,1303 1792.85,1329.35 1793.88,1329.35 R55.1@1799.54,1335 ; v1@1696,1435 1728,1403 1766.5,1403 1792.85,1429.35 1793.88,1429.35 R57.1@1799.54,1435 ; v1@1696,1535 1728,1503 1766.5,1503 1792.85,1529.35 1793.88,1529.35 R59.1@1799.54,1535 ; v1@1696,1635 1728,1603 1766.5,1603 1798.5,1635 R61.1@1799.54,1635
  other v1: 400,131 1694,135 400,231 1694,235 400,331 1694,335 400,431 1694,435 396.21,528.69 1694,535 400,631 1694,635 400,731 1694,735 400,831 1694,835 400,931 1694,935 400,1031 1694,1035 400,1131 1694,1135 400,1231 1694,1235 400,1331 1694,1335 400,1431 1694,1435 1694,1535 1694,1635
+9V: C1.2 C2.2 P1.2 U1.0 | length 413.9
  Top Layer w39: P1.2 144.32,1636.74 C2.2 312.17,1584.22 331.51,1564.89 342.17,1564.89 342.73,1564.34 U1.0@493,1564.34
BOOT0: P3.2 U2.44 | length 482.7
  Top Layer w11.8: P3.2 1075,1445 v1(1200,1320) ; U2.44 1194.47,1219.47 v1(1250,1275)
  Bottom Layer w11.8: v1(1200,1320) 1200,1300 1225,1275 v1(1250,1275)
GND: C1.1 C2.1 C3.1 C4.1 C5.1 C6.1 C7.1 C8.1 C9.1 C10.1 C11.1 C12.2 C13.2 C14.2 C15.2 D1.K P1.1 P2.4 P3.3 R4.2 R6.2 R8.2 R10.2 R12.2 R14.2 R16.2 R18.2 R20.2 R22.2 R24.2 R26.2 R28.2 R30.2 R32.2 R34.2 R36.2 R38.2 R40.2 R42.2 R44.2 R46.2 R48.2 R50.2 R52.2 R54.2 R56.2 R58.2 R60.2 R62.2 S1.1 U1.1 U2.8 U2.23 U2.35 U2.47 Y1.2 Y1.4 | length 3611
  Top Layer w11.8: U2.8 v1(1151.02,943.47) ; v1(1135.42,1060) U2.47 ; v1(1294.02,877) 1294.02,874.96 1312.58,856.39 U2.23 ; v1@1310.43,1061.58 U2.35
  Top Layer w16: S1.1 675,720.37 684.37,711 766.57,711 v1(802.57,747) ; C13.2 763.2,852.03 802.57,812.66 Y1.4 ; Y1.2 859.78,885.62 859.78,869.87 804,814.09 804,810.16 Y1.4 ; C15.2 C14.2 ; C15.2@891.65,1310 893.5,1308.16 893.5,1287.59 910,1271.08 v1(910,1270) ; C12.2 931,741 902,712 837.57,712 v1(802.57,747) ; v1(802.57,747) Y1.4
  Top Layer w32: R4.2 v1(348,131) ; R6.2 v1(348,231) ; R8.2 v1(348,331) ; R10.2 349,431 v1(350,430) ; R12.2 v1(348,531) ; R14.2 v1(348,631) ; R16.2 v1(348,731) ; R18.2 v1(348,831) ; R20.2 v1(348,931) ; R22.2 v1(348,1031) ; R24.2 v1(348,1131) ; R26.2 v1(348,1231) ; R28.2 v1(348,1331) ; R30.2 v1(348,1431) ; v1(952.77,1554.29) D1.K ; v1@1747.9,135 R32.2 R32.2@1799.54,135 ; v1@1747.9,235 R34.2 R34.2@1799.54,235 ; v1@1747.9,335 R36.2 R36.2@1799.54,335 ; v1@1747.9,435 R38.2 R38.2@1799.54,435 ; v1@1747.9,535 R40.2 R40.2@1799.54,535 ; v1(1747.9,635) R42.2 R42.2@1799.54,635 ; v1@1747.9,735 R44.2 R44.2@1799.54,735 ; v1@1747.9,835 R46.2 R46.2@1799.54,835 ; v1@1747.9,935 R48.2 R48.2@1799.54,935 ; v1@1747.9,1035 R50.2 R50.2@1799.54,1035 ; v1@1747.9,1135 R52.2 R52.2@1799.54,1135 ; v1@1747.9,1235 R54.2 R54.2@1799.54,1235 ; v1@1747.9,1335 R56.2 R56.2@1799.54,1335 ; v1@1747.9,1435 R58.2 R58.2@1799.54,1435 ; v1@1747.9,1535 R60.2 R60.2@1799.54,1535 ; v1@1747.9,1635 R62.2 R62.2@1799.54,1635
  Top Layer w39: C3.1@409.57,1743.63 U1.1@491.19,1743.63
  Top Layer w43: P1.1@147.17,1739.89 150.17,1742.88 227.02,1742.88 C1.1 C2.1 C3.1 408.98,1743.04 C3.1@409.57,1743.63 ; U1.1@493,1745.44 493.45,1745.89 v1(592.17,1745.89)
  Bottom Layer w11.8: v1@1131.02,1060 1132.02,1061 v1@1133.02,1061 ; v1@1294.02,876.84 v1(1294.02,877)
  Bottom Layer w32: C9.1@1092.83,874 C10.1@1092.83,925.25 ; C11.1@1092.83,978 C10.1@1092.83,925.25 ; C6.1 1115.73,1075.28 v1@1131.02,1060 ; v1(1151.02,943.47) 1133.05,925.5 1093.08,925.5 C10.1@1092.83,925.25 ; v1@1294.02,876.84 C8.1@1330.3,840.56 ; v1(1309.02,1061.58) 1326.98,1079.55 1357.46,1079.55 1357.71,1079.8 C4.1@1357.71,1133 ; C8.1 C7.1
  other v1: 1746,135 1746,235 1746,335 1746,435 1746,535 1746,735 1746,835 1746,935 1746,1035 1746,1135 1746,1235 1746,1335 1746,1435 1746,1535 1746,1635
IN/OUT: C12.1 R2.1 Y1.1 | length 118.3
  Top Layer w16: Y1.1 C12.1 R2.1
NetD1_A: D1.A R1.2 | length 98
  Top Layer w32: D1.A R1.2
NetR2_2: R2.2 U2.6 | length 171
  Top Layer w11.8: R2.2 931,954 959.84,982.84 U2.6
NRST: C11.2 S1.2 U2.7 | length 608.6
  Top Layer w11.8: v1(996.02,953) 998.23,953 1008.39,963.16 U2.7@1065.82,963.16
  Top Layer w16: S1.2 v1(675,1055)
  Bottom Layer w16: v1(675,1055) 894.02,1055 v1(996.02,953) 997.58,954.57 997.58,969.57 1006.02,978 C11.2@1037.71,978
OUT/IN: C13.1 U2.5 Y1.3 | length 354.2
  Top Layer w11.8: Y1.3 C13.1 802.57,981.57 823.53,1002.53 U2.5@1065.82,1002.53
PA0: P4.13 R27.2 R28.1 U2.10 | length 2144.2
  Top Layer w11.8: R28.1 230.54,1299.46 249.09,1280.91 424.09,1280.91 ; 426.54,1278.46 599,1106 599,532.56 671.36,460.2 852.12,460.2 1004.4,612.48 1004.4,747.72 973.82,778.3 973.82,872.57 1005.35,904.1 U2.10
  Top Layer w32: P4.13 R28.1
  Bottom Layer w32: P4.13 R27.2
PA1: P4.12 R25.2 R26.1 U2.11 | length 2068.7
  Top Layer w11.8: R26.1 230.54,1199.46 249.09,1180.91 424.09,1180.91 ; 424.3,1180.7 581.2,1023.8 581.2,525.18 663.98,442.4 859.5,442.4 1022.2,605.1 1022.2,755.09 991.62,785.67 991.62,865.19 1010.84,884.42 U2.11
  Top Layer w32: P4.12 R26.1
  Bottom Layer w32: P4.12 R25.2
PA2: P4.11 R23.2 R24.1 U2.12 | length 1990.3
  Top Layer w11.8: R24.1 230.54,1099.46 249.09,1080.91 424.09,1080.91 561.8,943.2 561.8,545.62 561.8,519.41 656.61,424.6 866.87,424.6 1040,597.73 1040,762.46 1009.42,793.05 1009.42,857.82 1016.33,864.73 U2.12
  Top Layer w32: P4.11 R24.1
  Bottom Layer w32: P4.11 R23.2
PA3: P4.10 R21.2 R22.1 U2.13 | length 1851
  Top Layer w11.8: R22.1 230.54,999.46 249.09,980.91 424.09,980.91 544,861 544,512.04 649.24,406.8 874.24,406.8 1115.73,648.29 U2.13
  Top Layer w32: P4.10 R22.1
  Bottom Layer w32: P4.10 R21.2
PA4: P4.9 R19.2 R20.1 U2.14 | length 1801.7
  Top Layer w11.8: R20.1 230.54,899.46 249.09,880.91 424.09,880.91 ; 425.36,879.64 524,781 524,506.87 641.87,389 881.62,389 1135.6,642.98 1135.6,717.21 1135.42,717.39 U2.14
  Top Layer w32: P4.9 R20.1
  Bottom Layer w32: P4.9 R19.2
PA5: P4.8 R17.2 R18.1 U2.15 | length 1755.8
  Top Layer w11.8: R18.1 230.54,799.46 249.09,780.91 424.09,780.91 504.39,700.61 504.39,501.31 634.49,371.2 888.99,371.2 1155.1,637.31 U2.15
  Top Layer w32: P4.8 R18.1
  Bottom Layer w32: P4.8 R17.2
PA6: P4.7 R15.2 R16.1 U2.16 | length 1708.2
  Top Layer w11.8: R16.1 230.54,699.46 249.09,680.91 424.09,680.91 486.59,618.41 486.59,493.93 627.12,353.4 896.36,353.4 1174.79,631.83 U2.16
  Top Layer w32: P4.7 R16.1
  Bottom Layer w32: P4.7 R15.2
PA7: P4.6 R13.2 R14.1 U2.17 | length 1660.2
  Top Layer w11.8: R14.1 230.54,599.46 249.09,580.91 424.09,580.91 ; 425,580.91 468.79,537.12 468.79,486.56 619.75,335.6 903.73,335.6 1194.47,626.34 U2.17
  Top Layer w32: P4.6 R14.1
  Bottom Layer w32: P4.6 R13.2
PA8: P5.5 R39.2 R40.1 U2.29 | length 1059.6
  Top Layer w11.8: U2.29 1457.22,943.47 1584,816.69 1584,590 1689,485 ; 1691,485 1846,485 1863.46,502.46 R40.1
  Top Layer w32: R40.1@1866.46,535 P5.5
  Bottom Layer w32: R39.2 P5.5@1973,535
PA9: P5.6 R41.2 R42.1 U2.30 | length 983.3
  Top Layer w11.8: U2.30 1462.71,963.16 1604,821.87 1604,672 1691,585 1846,585 1863.46,602.46 R42.1
  Top Layer w32: R42.1@1866.46,635 P5.6
  Bottom Layer w32: R41.2 P5.6@1973,635
PA10: P5.7 R43.2 R44.1 U2.31 | length 906.2
  Top Layer w11.8: U2.31 1468.2,982.84 1624,827.04 1624,752 1691,685 1846,685 1863.46,702.46 R44.1
  Top Layer w32: R44.1@1866.46,735 P5.7
  Bottom Layer w32: R43.2 P5.7@1973,735
PA11: P5.8 R45.2 R46.1 U2.32 | length 829.2
  Top Layer w11.8: U2.32 1473.68,1002.53 1691.21,785 1846.21,785 ; 1846,785 1863.46,802.46 R46.1
  Top Layer w32: R46.1@1866.46,835 P5.8
  Bottom Layer w32: R45.2 P5.8@1973,835
PA12: P5.9 R47.2 R48.1 U2.33 | length 795.7
  Top Layer w11.8: U2.33 1479.17,1022.21 1616.38,885 1846,885 1863.46,902.46 R48.1
  Top Layer w32: R48.1@1866.46,935 P5.9
  Bottom Layer w32: R47.2 P5.9@1973,935
PA14: P5.10 R49.2 R50.1 U2.38 | length 974.6
  Top Layer w11.8: U2.38@1312.58,1132.45 1312.58,1167.47 1378.11,1233 1443,1233 1691,985 1846,985 1863.46,1002.46 R50.1
  Top Layer w32: R50.1@1866.46,1035 P5.10
  Bottom Layer w32: R49.2 P5.10@1973,1035
PB0: P4.5 R11.2 R12.1 U2.18 | length 1627.7
  Top Layer w11.8: R12.1 230.54,499.46 249.09,480.91 449.27,480.91 612.37,317.8 911.11,317.8 1214.16,620.85 U2.18
  Top Layer w32: P4.5 R12.1
  Bottom Layer w32: P4.5 R11.2
PB1: P4.4 R9.2 R10.1 U2.19 | length 1623.9
  Top Layer w11.8: R10.1 230.54,399.46 249.09,380.91 524.09,380.91 605,300 918.48,300 1233.84,615.36 U2.19
  Top Layer w32: P4.4 R10.1
  Bottom Layer w32: P4.4 R9.2
PB2: P4.3 R7.2 R8.1 U2.20 | length 1621.2
  Top Layer w11.8: R8.1 230.54,299.46 249.09,280.91 924.56,280.91 1253.53,609.87 U2.20
  Top Layer w32: P4.3 R8.1
  Bottom Layer w32: P4.3 R7.2
PB3: P5.11 R51.2 R52.1 U2.39 | length 970.8
  Top Layer w11.8: U2.39@1292.9,1132.45 1292.9,1172.96 1370.74,1250.8 1455.03,1250.8 1620.83,1085 1846,1085 1863.46,1102.46 R52.1
  Top Layer w32: R52.1@1866.46,1135 P5.11
  Bottom Layer w32: R51.2 P5.11@1973,1135
PB4: P5.12 R53.2 R54.1 U2.40 | length 967.1
  Top Layer w11.8: U2.40@1273.21,1132.45 1273.21,1178.45 1363.36,1268.6 1462.4,1268.6 1546,1185 1846,1185 1863.46,1202.46 R54.1
  Top Layer w32: R54.1@1866.46,1235 P5.12
  Bottom Layer w32: R53.2 P5.12@1973,1235
PB5: P5.13 R55.2 R56.1 U2.41 | length 962.1
  Top Layer w11.8: U2.41 1253.53,1183.94 1355.99,1286.4 1847.4,1286.4 1863.46,1302.46 R56.1
  Top Layer w32: R56.1@1866.46,1335 P5.13
  Bottom Layer w32: R55.2 P5.13@1973,1335
PB6: P5.14 R57.2 R58.1 U2.42 | length 1025
  Top Layer w11.8: U2.42 1233.84,1189.42 1429.42,1385 1620.59,1385 ; 1622,1385 1846,1385 1863.46,1402.46 R58.1
  Top Layer w32: R58.1@1866.46,1435 P5.14
  Bottom Layer w32: R57.2 P5.14@1973,1435
PB7: P5.15 R59.2 R60.1 U2.43 | length 1090.8
  Top Layer w11.8: U2.43 1214.16,1194.91 1504.25,1485 1846,1485 1863.46,1502.46 R60.1
  Top Layer w32: R60.1@1866.46,1535 P5.15
  Bottom Layer w32: R59.2 P5.15@1973,1535
PB8: P5.16 R61.2 R62.1 U2.45 | length 1197.4
  Top Layer w11.8: U2.45 1174.79,1238.96 1520.83,1585 1846,1585 1863.46,1602.46 R62.1
  Top Layer w32: R62.1@1866.46,1635 P5.16
  Bottom Layer w32: R61.2 P5.16@1973,1635
PB9: P4.14 R29.2 R30.1 U2.46 | length 1344
  Top Layer w11.8: R30.1 230.54,1399.46 249.09,1380.91 820,1380.91 855.41,1345.5 1041.5,1345.5 1155.1,1231.9 U2.46
  Top Layer w32: P4.14 R30.1
  Bottom Layer w32: P4.14 R29.2
PB10: P4.2 R5.2 R6.1 U2.21 | length 1685
  Top Layer w11.8: R6.1@231.44,230.09 231.44,198.56 250,180 848.83,180 1273.21,604.39 U2.21
  Top Layer w32: P4.2 R6.1
  Bottom Layer w32: P4.2 R5.2
PB11: P4.1 R3.2 R4.1 U2.22 | length 1750.6
  Top Layer w11.8: R4.1 230.54,99.46 250,80 774,80 1292.9,598.9 U2.22
  Top Layer w32: P4.1 R4.1
  Bottom Layer w32: P4.1 R3.2
PB12: P5.1 R31.2 R32.1 U2.25 | length 1374.8
  Top Layer w11.8: U2.25@1383.45,864.73 1412.99,864.73 1435.27,864.73 1512.8,787.2 1512.8,263.2 1691,85 1846,85 1863.46,102.46 R32.1
  Top Layer w32: R32.1 P5.1
  Bottom Layer w32: R31.2 P5.1
PB13: P5.2 R33.2 R34.1 U2.26 | length 1291.7
  Top Layer w11.8: U2.26 1440.76,884.42 1530.6,794.57 1530.6,345.4 1691,185 1846,185 1863.46,202.46 R34.1
  Top Layer w32: R34.1@1866.46,235 P5.2
  Bottom Layer w32: R33.2 P5.2@1973,235
PB14: P5.3 R35.2 R36.1 U2.27 | length 1214.6
  Top Layer w11.8: U2.27 1446.24,904.1 1548.4,801.95 1548.4,427.6 1691,285 1846,285 1863.46,302.46 R36.1
  Top Layer w32: R36.1@1866.46,335 P5.3
  Bottom Layer w32: R35.2 P5.3@1973,335
PB15: P5.4 R37.2 R38.1 U2.28 | length 1137.5
  Top Layer w11.8: U2.28 1451.73,923.79 1566.2,809.32 1566.2,509.8 1691,385 1846,385 1863.46,402.46 R38.1
  Top Layer w32: R38.1@1866.46,435 P5.4
  Bottom Layer w32: R37.2 P5.4@1973,435
SWCLK: P2.3 U2.37 | length 484.1
  Top Layer w11.8: P2.3 1179,1426.1 v1(1244,1361.1) ; U2.37 1332.27,1161.98 1373.29,1203 1385.09,1203 1385.42,1202.67 1402.43,1202.67 v1(1404,1201.1)
  Bottom Layer w11.8: v1(1244,1361.1) v1(1404,1201.1)
SWDIO: P2.2 U2.34 | length 724.4
  Top Layer w11.8: P2.2 1229,1423 1249,1403 v1(1284,1403) ; U2.34 1512.9,1041.9 v1(1544,1073)
  Bottom Layer w11.8: v1(1284,1403) 1544,1143 v1(1544,1073)
pads on no net: U2.1 U2.2

## Polygon pours and split planes (outlines as drawn)
GND on Bottom Layer "GND_L04_P001" (solid, remove dead copper, pour order 1): 0,22 0,1843 2102,1843 2102,22
GND on Top Layer "GND_L01_P000" (solid, remove dead copper, pour order 0): 0,22 0,1843 2102,1843 2102,22
+3.3V on 3.3V Layer (split plane): 2081.9,20.1 20.1,20.1 20.1,1822.9 2081.9,1822.9
GND on GND Layer (split plane): 2081.9,20.1 20.1,20.1 20.1,1822.9 2081.9,1822.9

## Keep-outs
Keep-Out Layer:
  the board outline again, w32

## Silkscreen, mask and mechanical layers (free items; w line width, h text height)
Top Overlay:
  text "GND" at 107,1788.5 h40
  text "PB8" at 2061.43,1603 h40 r90
  text "9V" at 118,1564.46 h40
  text "GND" at 1141.02,1526 h40 r90
  text "SWCLK" at 1191.03,1526 h40 r90
  text "SWDIO" at 1241.03,1526 h40 r90
  text "3.3V" at 1291.03,1526 h40 r90
  text "PB7" at 2060.89,1503.55 h40 r90
  text "3.3V" at 889.03,1482.97 h40
  text "PB9" at 34.5,1463 h40 r270
  text "BOOT0" at 851.18,1432.97 h40
  text "PB6" at 2061.33,1402.55 h40 r90
  text "GND" at 889.4,1382.98 h40
  text "PA0" at 34.5,1366 h40 r270
  text "PB5" at 2060.89,1301.55 h40 r90
  text "PA1" at 34.94,1261 h40 r270
  text "PB4" at 2060.89,1202 h40 r90
  text "PA2" at 34.54,1160 h40 r270
  text "PB3" at 2061.39,1104.55 h40 r90
  text "PA3" at 34.5,1059 h40 r270
  text "PA14" at 2060.95,994.55 h40 r90
  text "PA4" at 35,962.34 h40 r270
  text "PA12" at 2061.35,895.55 h40 r90
  text "PA5" at 35,861.79 h40 r270
  text "PA11" at 2060.95,797 h40 r90
  text "PA6" at 34.55,762.08 h40 r270
  text "PA10" at 2061.39,692.55 h40 r90
  text "PA7" at 35,661.96 h40 r270
  text "PA9" at 2061.39,601.55 h40 r90
  text "PB0" at 34.5,562.23 h40 r270
  text "PA8" at 2061.43,502.55 h40 r90
  text "PB1" at 34.94,461.23 h40 r270
  text "PB15" at 2060.95,393 h40 r90
  text "PB2" at 34.54,363 h40 r270
  text "PB14" at 2060.95,293.55 h40 r90
  text "PB10" at 34.5,271 h40 r270
  text "PB13" at 2061.39,194.55 h40 r90
  text "PB11" at 34.94,169 h40 r270
  text "PB12" at 2061.35,93.55 h40 r90

## Dimensions
2102,1843 to 2102,0 on Mechanical 15
0,1843 to 2102,0 on Mechanical 15